# EAGLE board STOMPBOX_2.0_v14 (EAGLE 9.7.0)
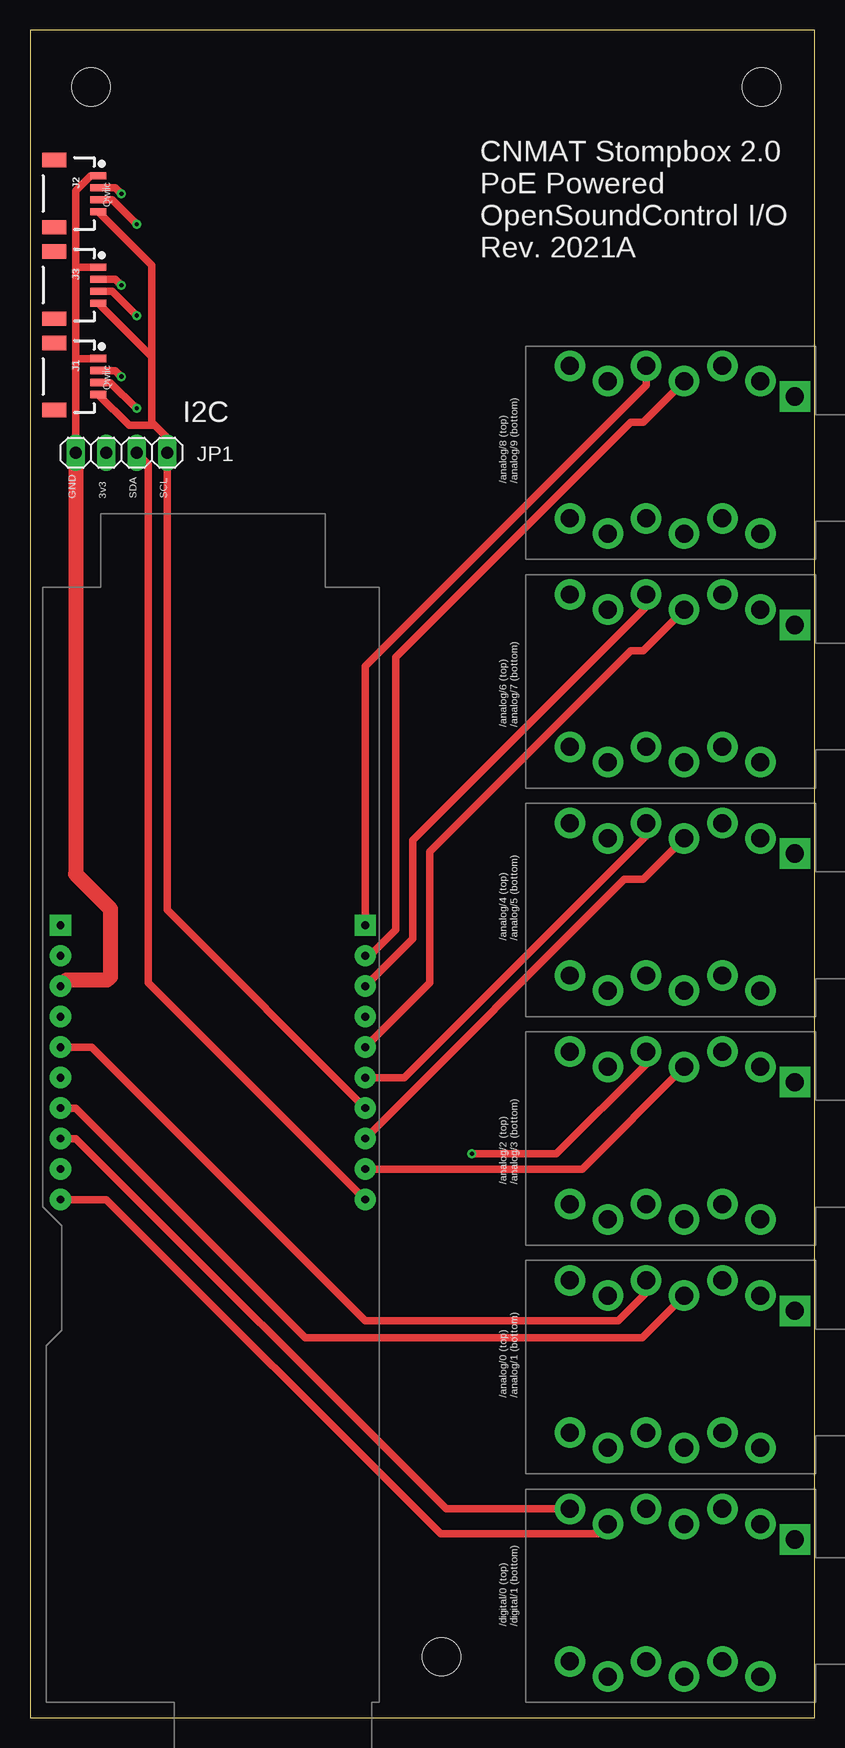
[diagram p0: board, top side]
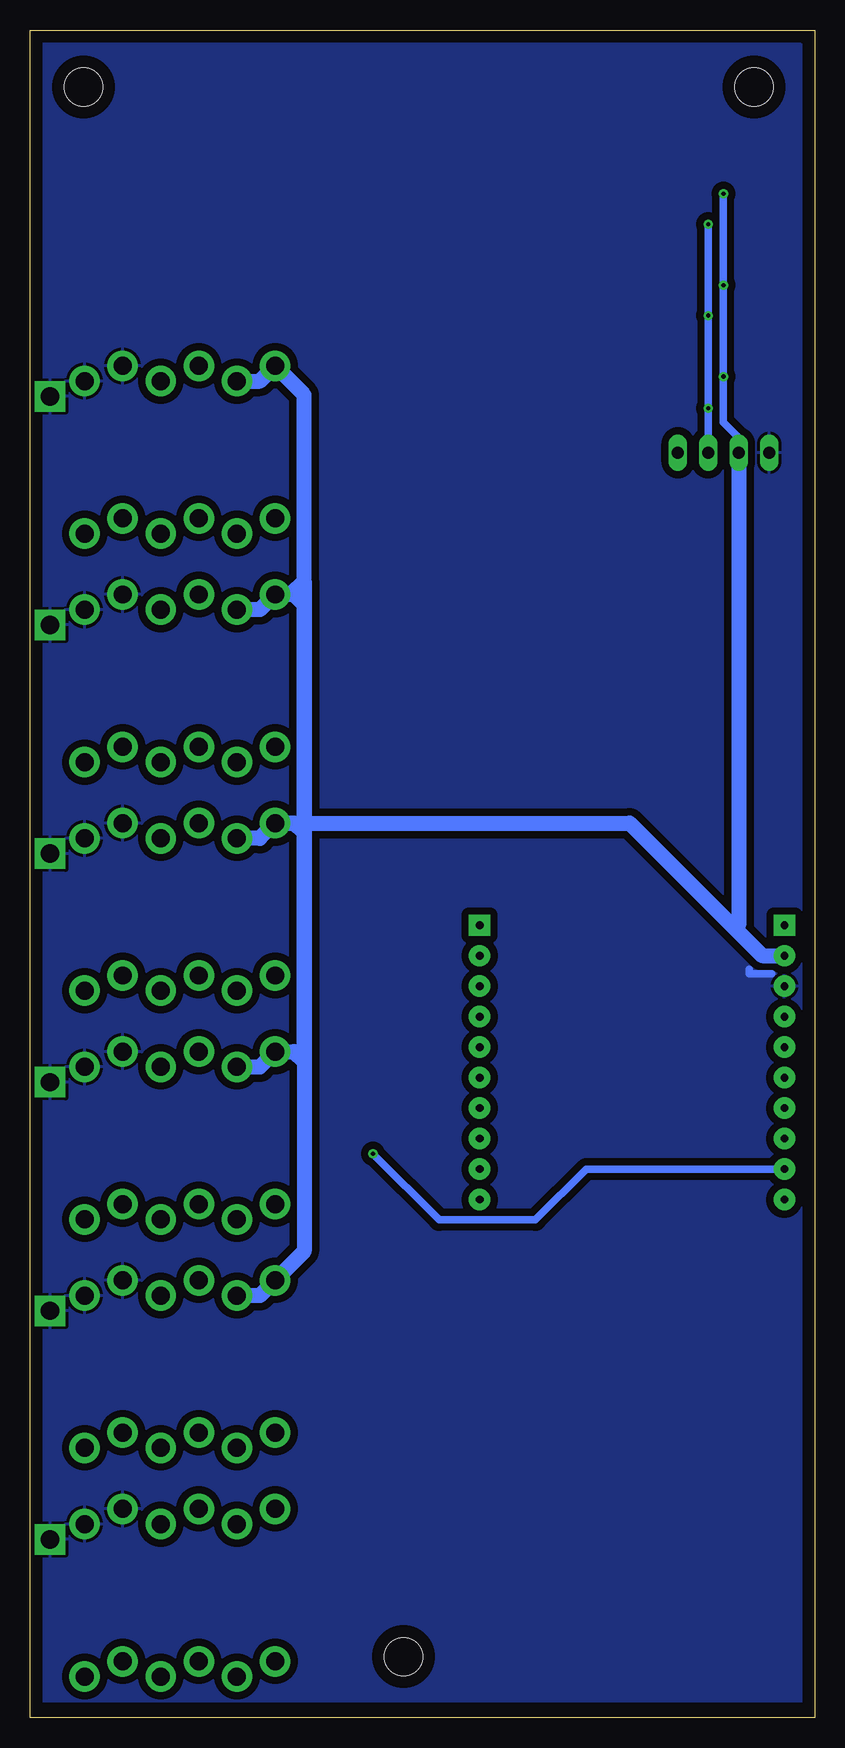
[diagram p1: board, bottom side, seen from below]

Size 65.41 x 140.64 mm. Coordinates in mm from the lower left corner, seen from the top.
Outline: 0,0 65.41,0 65.41,140.64 0,140.64 0,0
Copper layers (1*16): Top 0.035mm / dielectric 1.5mm / Bottom 0.035mm
Design rules "default *": minimum track width 6mil, minimum drill 0.35mm, track to track 24mil, track to pad 10mil, pad to pad 6mil, via to via 20mil, smd to smd 6mil, copper to edge 40mil, drill to drill 6mil, minimum pad ring 10mil, minimum via ring 8mil, stop-mask expansion 4mil, vias tented up to drill 0mil, thermal gap 10mil
Holes 3.17 mm at 5.08,135.89 60.96,135.89 34.29,5.08

## Footprints (pad centres in the part's own frame; a part is rotated, then mirrored left to right if it is on the bottom)
1X04_1MM_RA = smd 0.6 x 1.35: 1 -1.5,0; 2 -0.5,0; 3 0.5,0; 4 1.5,0 | smd 1.2 x 2: NC1 2.8,-3.675; NC2 -2.8,-3.675
1X04 = drill 1.016 long: 1 -3.81,0; 2 -1.27,0; 3 1.27,0; 4 3.81,0
NSJ12HC = drill 1.524 pad 2.54 square: GND -1.727,5.969 | drill 1.499 pad 2.54: RB -10.947,7.239; RNB -10.947,-5.461; RNT -14.122,-4.191; RT -14.122,8.509; SB -4.597,7.239; SNB -4.597,-5.461; SNT -7.772,-4.191; ST -7.772,8.509; TB -17.297,7.239; TNB -17.297,-5.461; TNT -20.472,-4.191; TT -20.472,8.509
ESP32-POE-ISO = drill 0.65 pad 1.778: +3V3 -12.7,3.81; ESP_EN -12.7,-1.27; GND -12.7,1.27; GPIO0 -12.7,-3.81; GPIO1 -12.7,-6.35; GPIO2 -12.7,-8.89; GPIO3 -12.7,-11.43; GPIO4 -12.7,-13.97; GPIO5 -12.7,-16.51; GPIO13 12.7,-16.51; GPIO14 12.7,-13.97; GPIO15 12.7,-11.43; GPIO16 12.7,-8.89; GPIO32 12.7,-6.35; GPIO33 12.7,-3.81; GPIO34 12.7,-1.27; GPIO35 12.7,1.27; GPIO36 12.7,3.81 | drill 0.65 pad 1.778 square: +5V -12.7,6.35; GPIO39 12.7,6.35

## Placement (x,y rotation side)
J1  [1X04_1MM_RA]  5.69,111.76 270 top
J2  [1X04_1MM_RA]  5.69,127 270 top
J3  [1X04_1MM_RA]  5.69,119.38 270 top
JP1  PINHD-1X4  [1X04]  7.62,105.41 0 top
U$1  NSJ12HC  [NSJ12HC]  65.46,8.89 0 top
U$2  NSJ12HC  [NSJ12HC]  65.46,27.94 0 top
U$3  NSJ12HC  [NSJ12HC]  65.46,46.99 0 top
U$4  NSJ12HC  [NSJ12HC]  65.46,66.04 0 top
U$5  NSJ12HC  [NSJ12HC]  65.46,85.09 0 top
U$6  NSJ12HC  [NSJ12HC]  65.46,104.14 0 top
U$8  ESP32-POE-ISO  [ESP32-POE-ISO]  15.24,59.69 0 top

## Library data of the parts
J1-J3 = SparkFun-Connectors
JP1 = Connector; CATEGORY: CONNECTOR; SUB-CATEGORY: PIN-HEADER
U$1-U$6 U$8 = ESP32-PoE-ISO

## Nets
+3.3V: J1.2 J2.2 J3.2 JP1.2 U$2.TB U$2.TT U$3.TB U$3.TT U$4.TB U$4.TT U$5.TB U$5.TT U$6.TB U$6.TT U$8.+3V3
GND: J1.1 J2.1 J3.1 JP1.1 U$1.GND U$1.SB U$1.ST U$2.GND U$2.SB U$2.ST U$3.GND U$3.SB U$3.ST U$4.GND U$4.SB U$4.ST U$5.GND U$5.SB U$5.ST U$6.GND U$6.SB U$6.ST U$8.GND
N$1: U$1.TT U$8.GPIO3
N$2: U$1.TB U$8.GPIO5
N$3: U$2.RT U$8.GPIO0
N$4: U$2.RB U$8.GPIO2
N$5: U$3.RT U$8.GPIO4
N$6: U$3.RB U$8.GPIO14
N$7: U$4.RB U$8.GPIO15
N$8: U$4.RT U$8.GPIO32
N$9: U$5.RB U$8.GPIO33
N$11: U$6.RT U$8.GPIO39
N$12: U$6.RB U$8.GPIO36
N$13: U$5.RT U$8.GPIO35
N$15: J1.4 J2.4 J3.4 JP1.4 U$8.GPIO16
N$16: J1.3 J2.3 J3.3 JP1.3 U$8.GPIO13

## Tracks (layer width: path | path; a pad name or v marks a point on that pad's centre or on a via)
+3.3V  (via drill 0.35)
  Top 0.61: J2.2 7.12,127.5 v7.62,127 | J3.2 7.12,119.88 v7.62,119.38 | J1.2 7.12,112.26 v7.62,111.76
  Bottom 0.61: JP1.2 6.35,106.68 7.62,107.95 v7.62,111.76 v7.62,119.38 v7.62,127
  Bottom 1.27: U$2.TB 46.26,35.18 U$2.TT 42.58,38.86 42.58,54.66 | U$4.TT 46.26,73.28 U$4.TB | U$5.TT 46.26,92.33 U$5.TB | U$6.TB 46.26,111.38 U$6.TT 42.58,110.24 42.58,94.74 | U$4.TT 43.41,74.55 42.58,73.71 42.58,55.37 42.7,55.5 U$3.TT | U$5.TT 43.41,93.6 42.58,92.76 42.58,74.42 42.7,74.55 U$4.TT | U$5.TT 43.72,93.6 42.58,94.74 | U$8.+3V3 4.39,63.5 6.64,65.75 | U$4.TT 15.44,74.55 6.64,65.75 | U$3.TT 43.41,55.5 42.58,54.66 | 42.58,94.74 42.58,54.66 | U$3.TB 46.26,54.23 U$3.TT | JP1.2 6.35,66.04 6.64,65.75
GND
  Top 0.61: J2.1 5.07,128.5 3.81,127.24 3.81,125.16 3.83,125.14 3.83,120.7 | 3.83,120.7 3.83,113.03 | 3.83,113.03 3.83,105.43 JP1.1 | J1.1 4.06,113.26 3.83,113.03 | J3.1 4.01,120.88 3.83,120.7
  Top 1.27: U$8.GND 3.05,61.47 6.43,61.47 6.71,61.74 6.71,67.4 3.81,70.3 JP1.1
  Bottom 0.61: 3.58,62 5.48,62 5.48,62.35
  pour Bottom: 0.08,1.35 65.3,1.35 65.3,140.54 2.22,140.54 0.08,138.4
N$1
  Top 0.61: U$8.GPIO3 3.81,48.26 34.67,17.4 U$1.TT
N$2
  Top 0.61: U$8.GPIO5 6.35,43.18 34.21,15.32 47.35,15.32 U$1.TB
N$3
  Top 0.61: U$2.RT 51.34,35.41 49.03,33.1 27.94,33.1 5.16,55.88 U$8.GPIO0
N$4
  Top 0.61: U$8.GPIO2 3.81,50.8 22.94,31.67 51.01,31.67 U$2.RB
N$5  (via drill 0.35)
  Top 0.61: v36.83,46.99 43.87,46.99 51.34,54.46 U$3.RT
  Bottom 0.61: U$8.GPIO4 19.05,45.72 23.29,41.48 31.32,41.48 v36.83,46.99
N$6
  Top 0.61: U$8.GPIO14 46.01,45.72 U$3.RB
N$7
  Top 0.61: U$4.RB 51.09,69.85 49.53,69.85 U$8.GPIO15
N$8
  Top 0.61: U$4.RT 51.34,73.51 31.17,53.34 U$8.GPIO32
N$9
  Top 0.61: U$5.RB 51.09,88.9 50.04,88.9 33.33,72.18 33.33,61.27 U$8.GPIO33
N$11
  Top 0.61: U$6.RT 51.34,111.03 27.94,87.63 U$8.GPIO39
N$12
  Top 0.61: U$6.RB 51.09,107.95 50.04,107.95 30.48,88.39 30.48,65.65 28.33,63.5 U$8.GPIO36
N$13
  Top 0.61: U$5.RT 51.34,92.56 31.9,73.12 31.9,64.92 U$8.GPIO35
N$15
  Top 0.61: 10.16,113.41 10.16,109.22 10.16,107.95 | 10.16,107.95 10.16,107.7 8.26,107.7 J1.4 | 10.16,107.95 11.43,106.68 JP1.4 11.43,67.31 U$8.GPIO16 | J2.4 10.16,121.03 10.16,113.41 | 10.16,113.41 J3.4
N$16  (via drill 0.35)
  Top 0.61: JP1.3 9.86,104.44 9.86,61.27 U$8.GPIO13 | J3.3 6.85,118.88 v8.89,116.84 | J1.3 6.71,111.25 8.84,109.12 v8.89,109.12 | J2.3 6.85,126.5 v8.89,124.46
  Bottom 0.61: v8.89,124.46 v8.89,116.84 v8.89,109.12 JP1.3

## Text on the board
tNames: Qwiic | CNMAT Stompbox 2.0 / PoE Powered / OpenSoundControl I/O / Rev. 2021A | Qwiic | I2C | /analog/8 (top) / /analog/9 (bottom) | GND | 3v3 | SDA | SCL | /analog/6 (top) / /analog/7 (bottom) | /analog/4 (top) / /analog/5 (bottom) | /analog/2 (top) / /analog/3 (bottom) | /analog/0 (top) / /analog/1 (bottom) | /digital/0 (top) / /digital/1 (bottom)